# Altium PCB PCB_3U_CamLink.PCBDOC (part 1 of 2)
Units mm, origin at the board's own origin, x right, y up, seen from the top; angles counter-clockwise.
Board outline 64.5 x 100 mm, 4 copper layers (TopLayer, Internal Plane 2, Internal Plane 1, BottomLayer), stack 1.543 mm thick; 107 components, 81 nets, 488 pads, 183 vias.
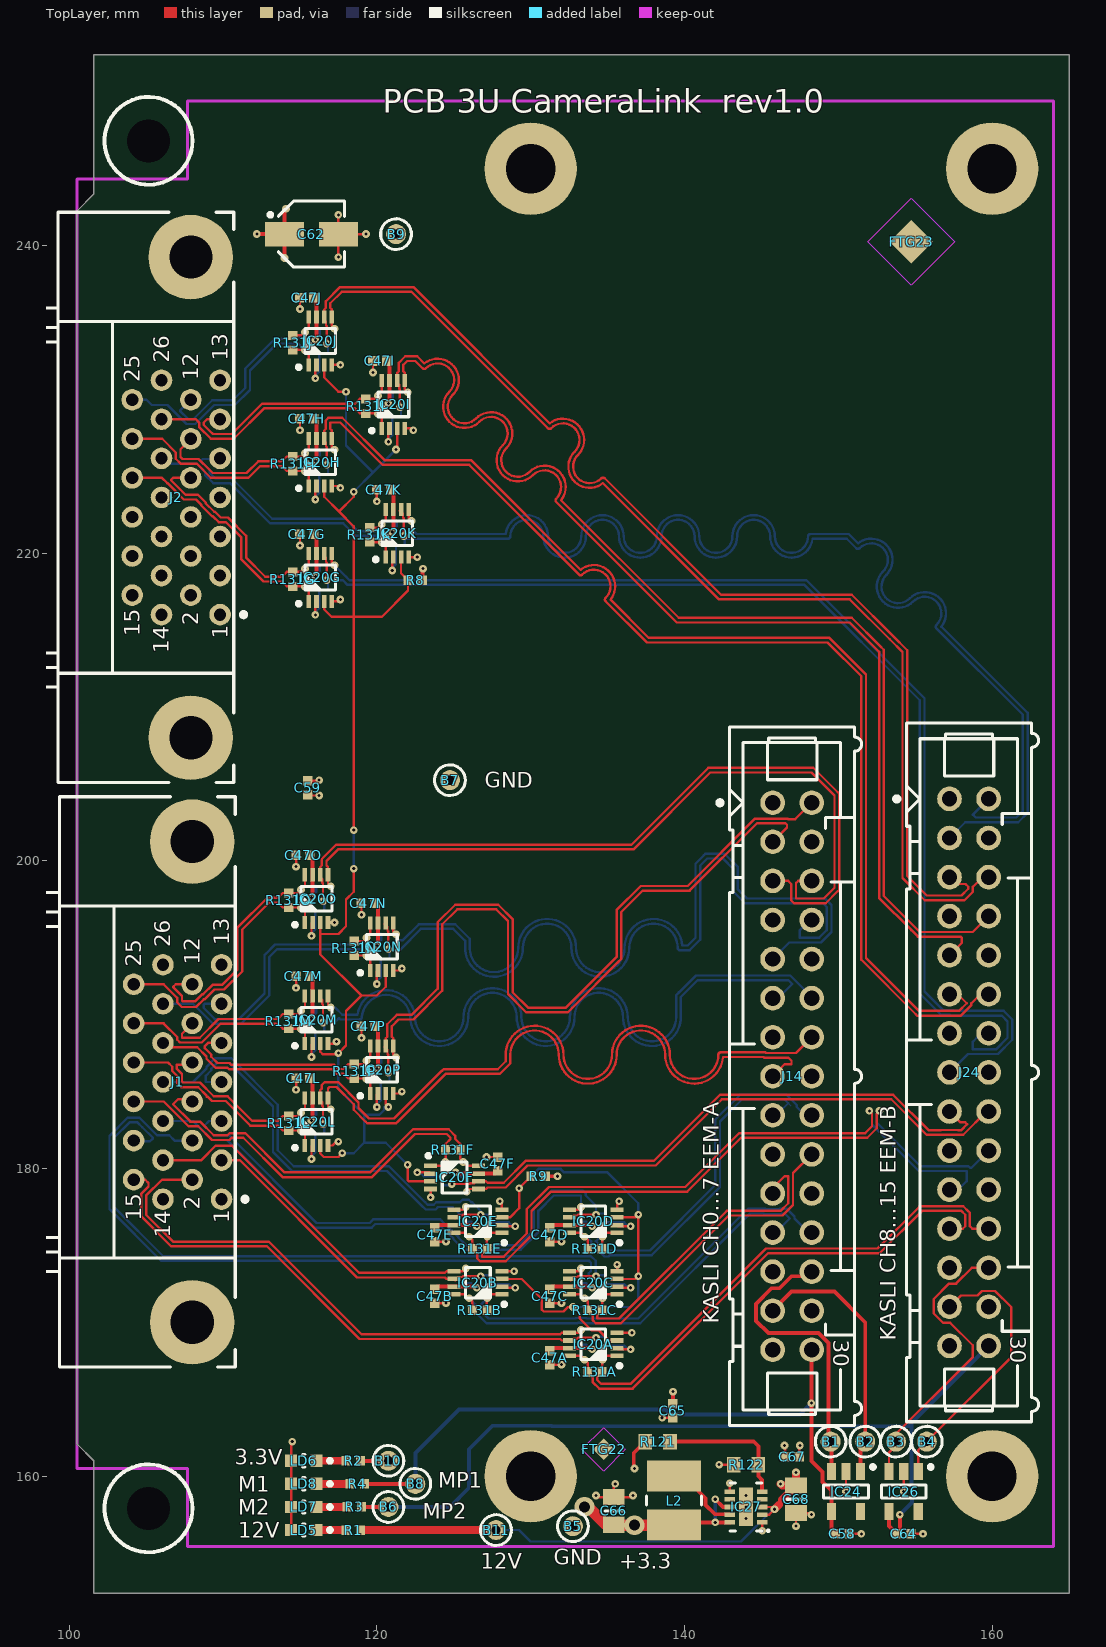
[diagram p0: TopLayer view]
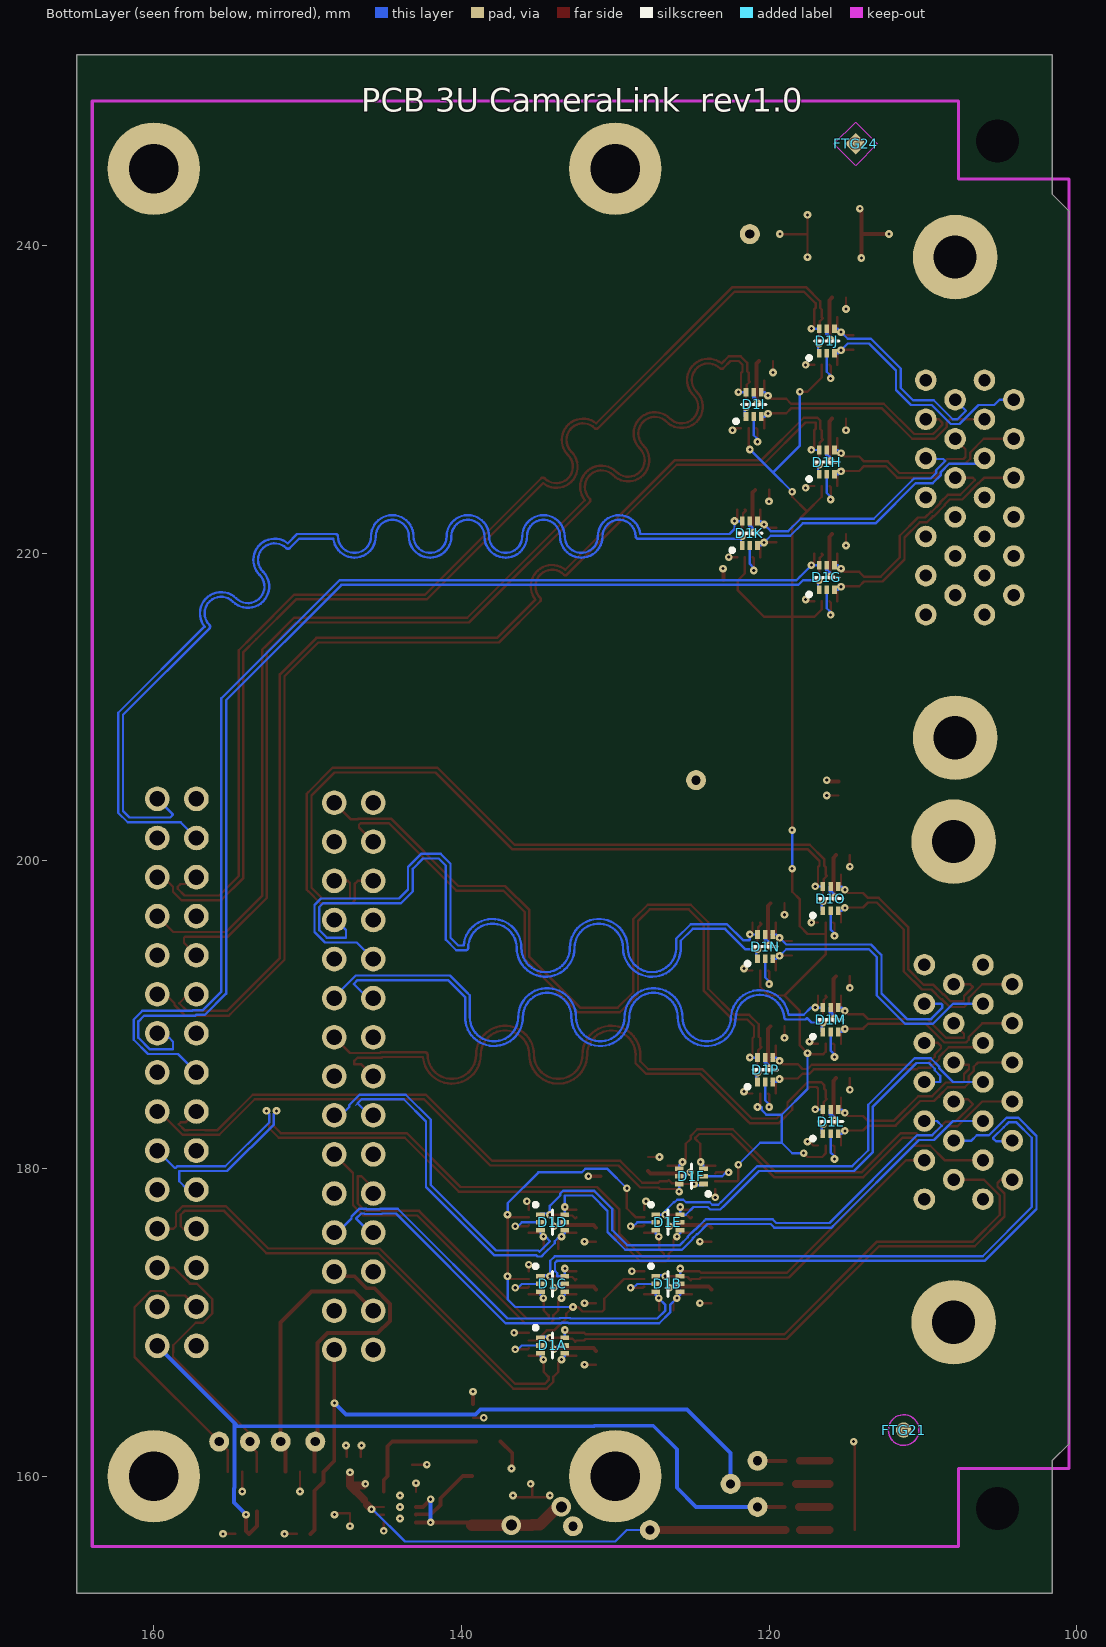
[diagram p1: BottomLayer view, seen from below]
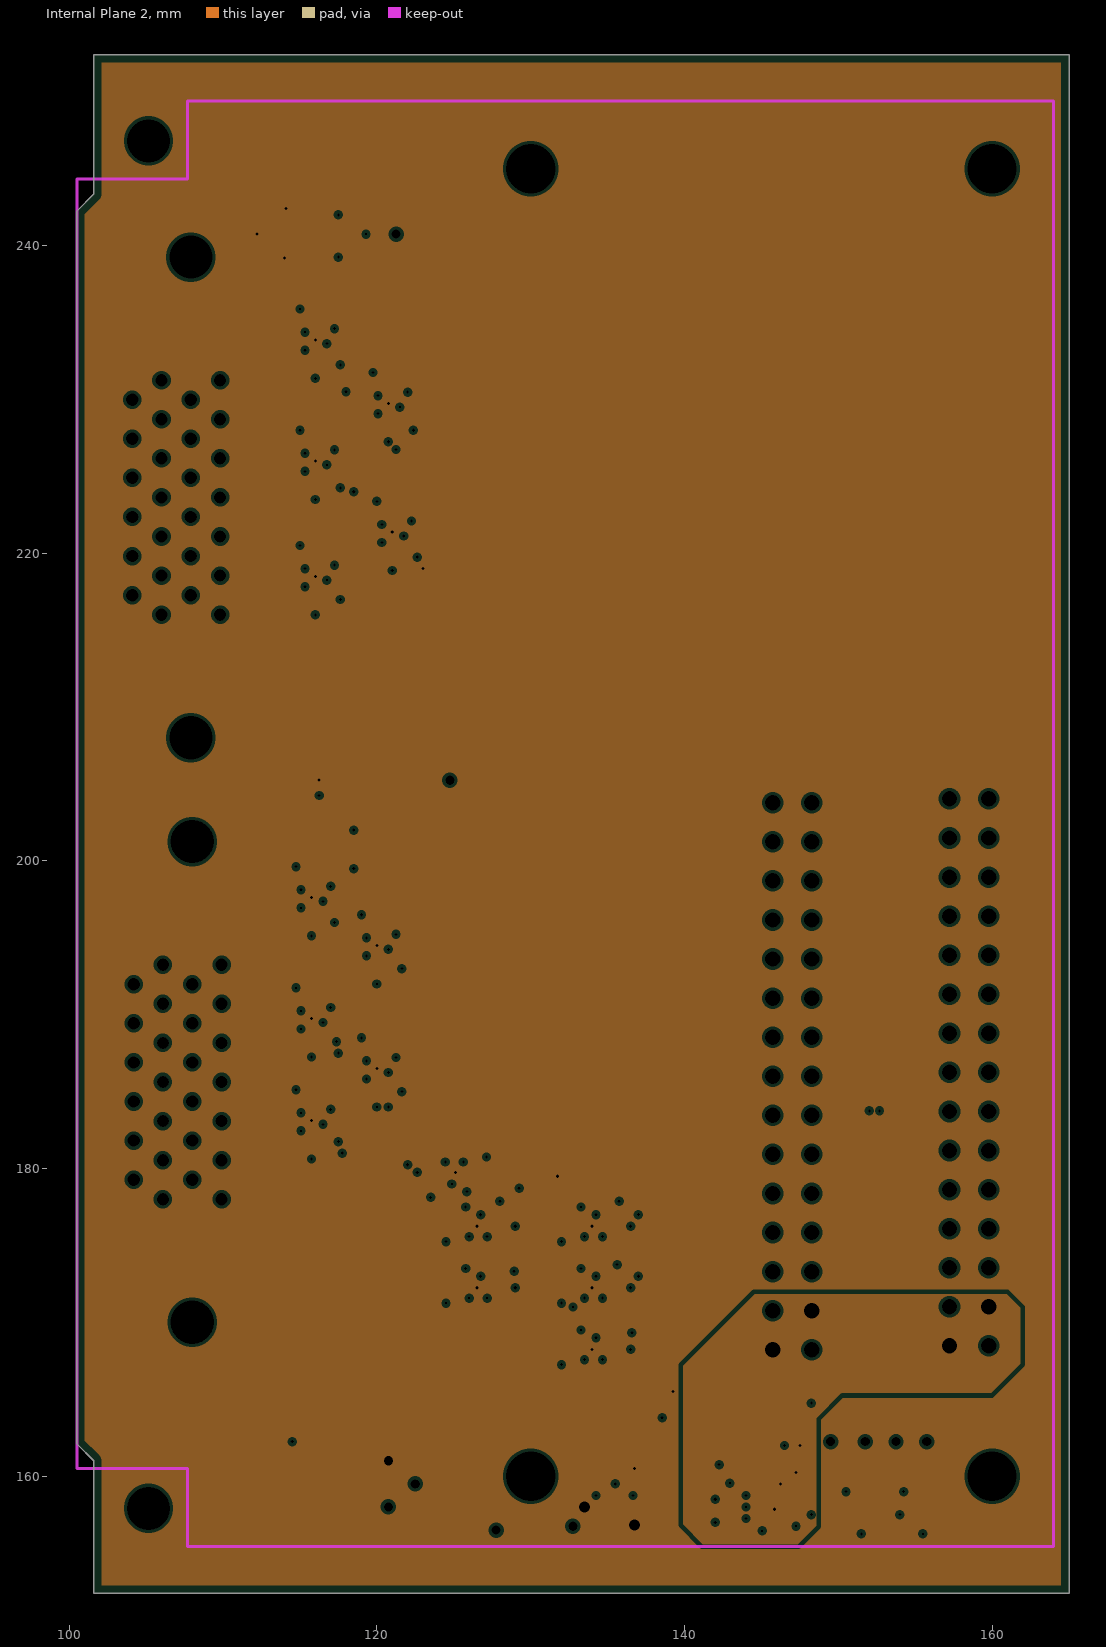
[diagram p2: Internal Plane 2, clearances drawn from the general rule]
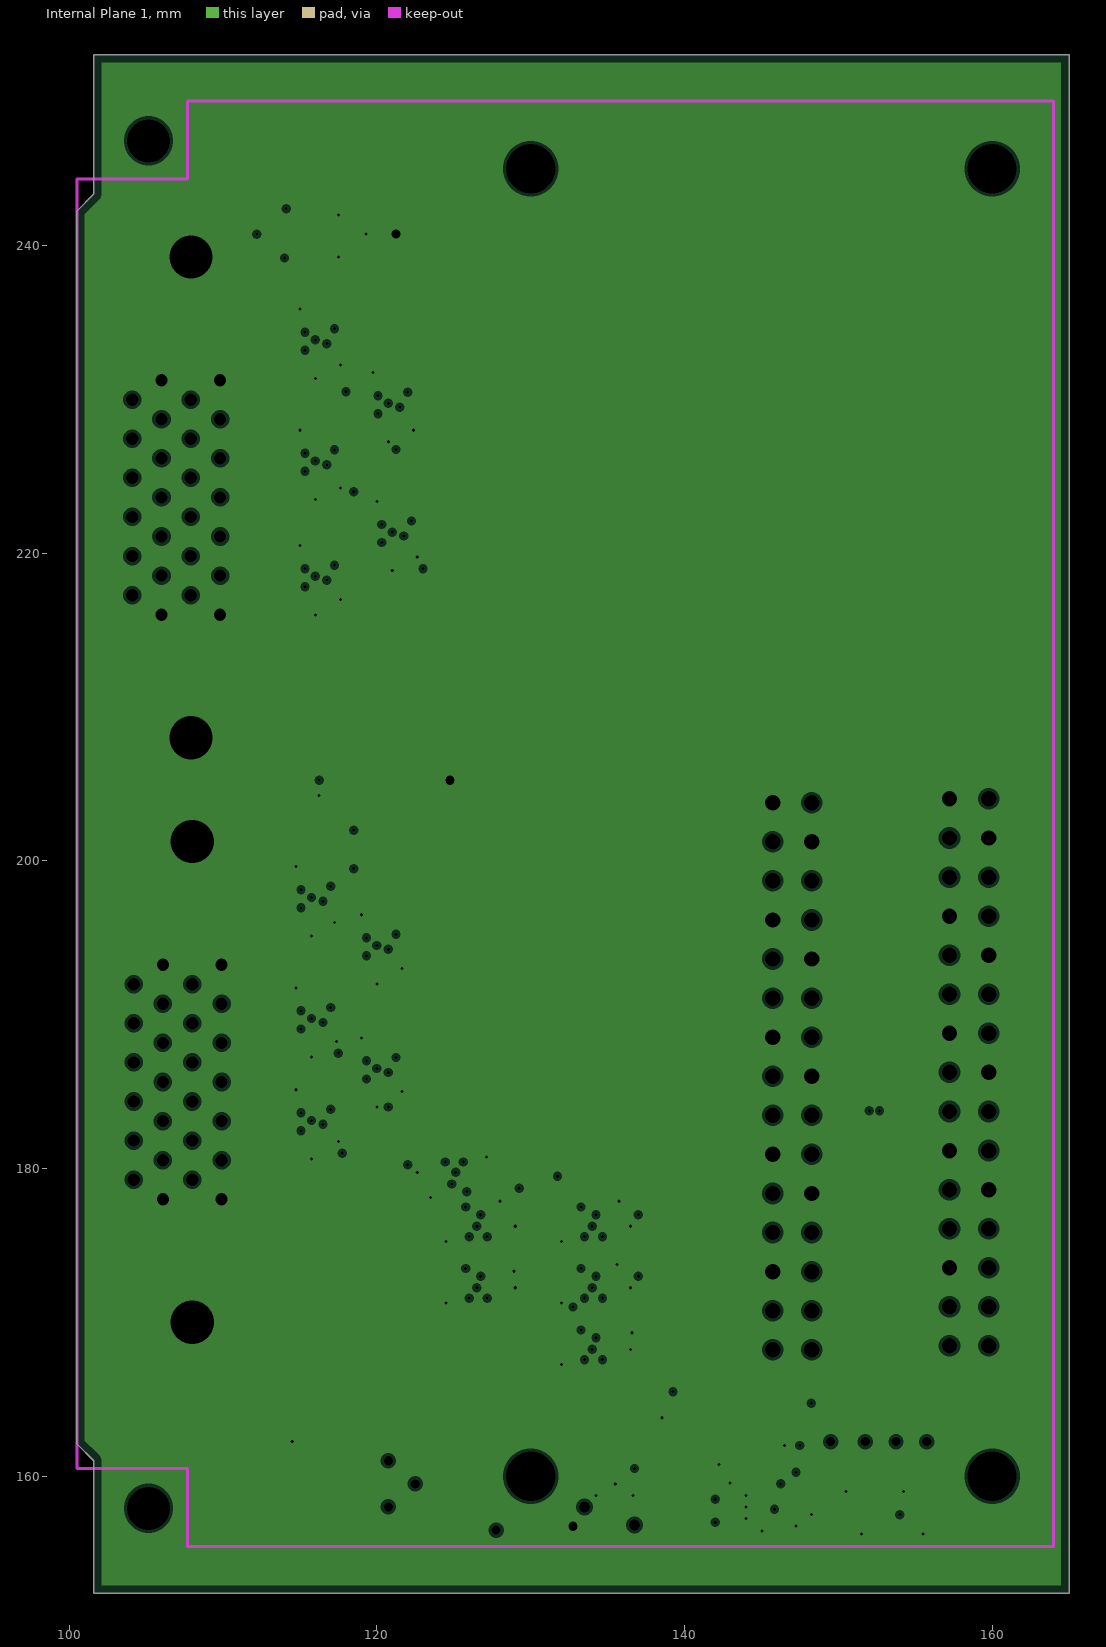
[diagram p3: Internal Plane 1, clearances drawn from the general rule]
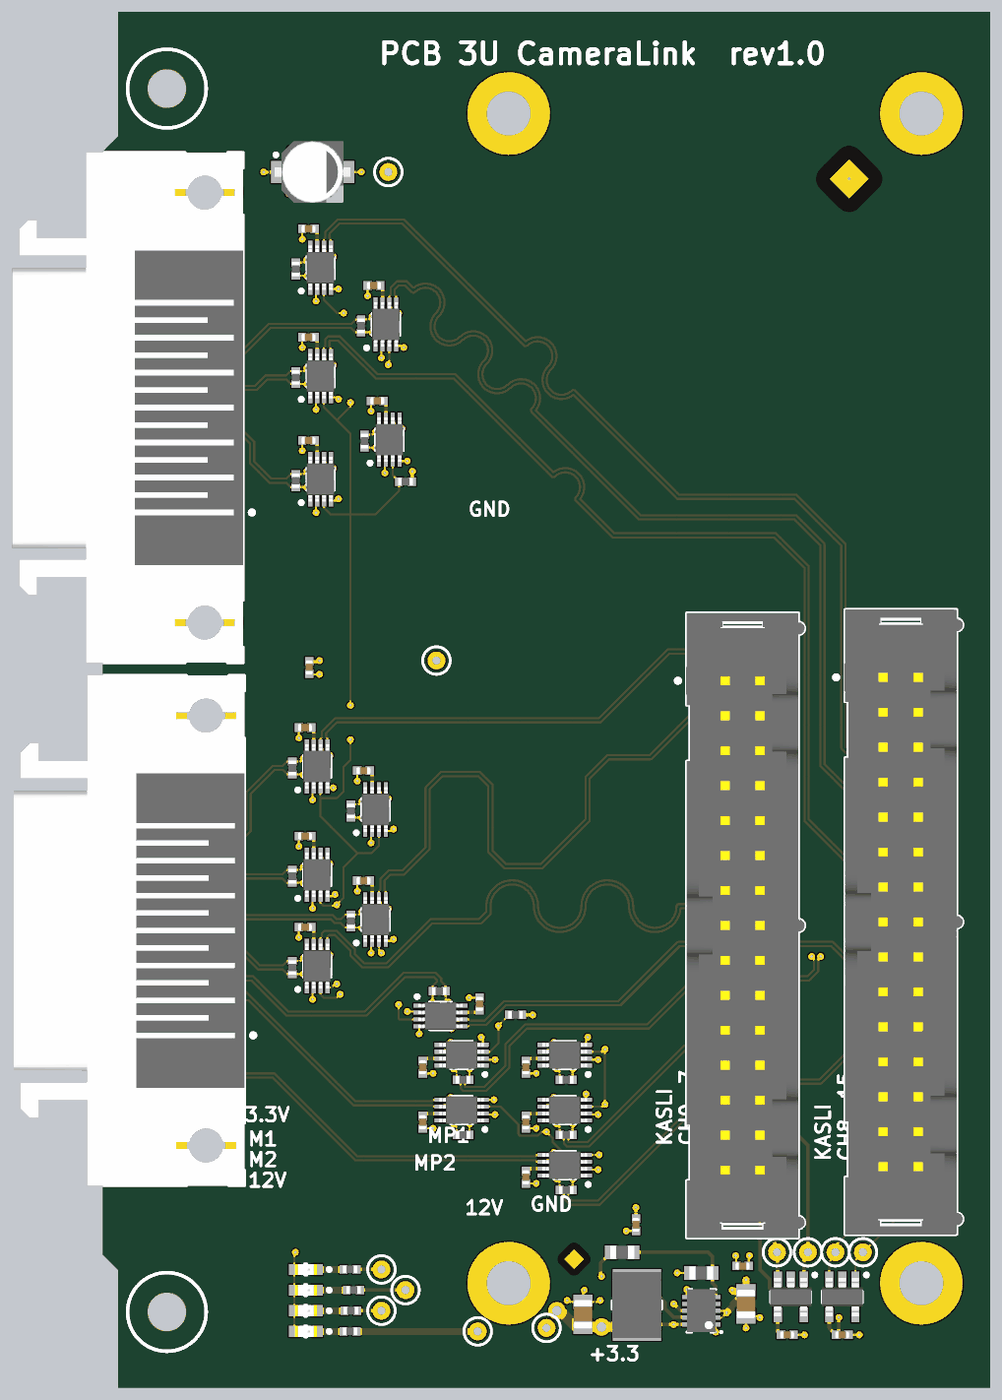
[diagram p5: 3D render of the assembled board from above, using the file's embedded part models]
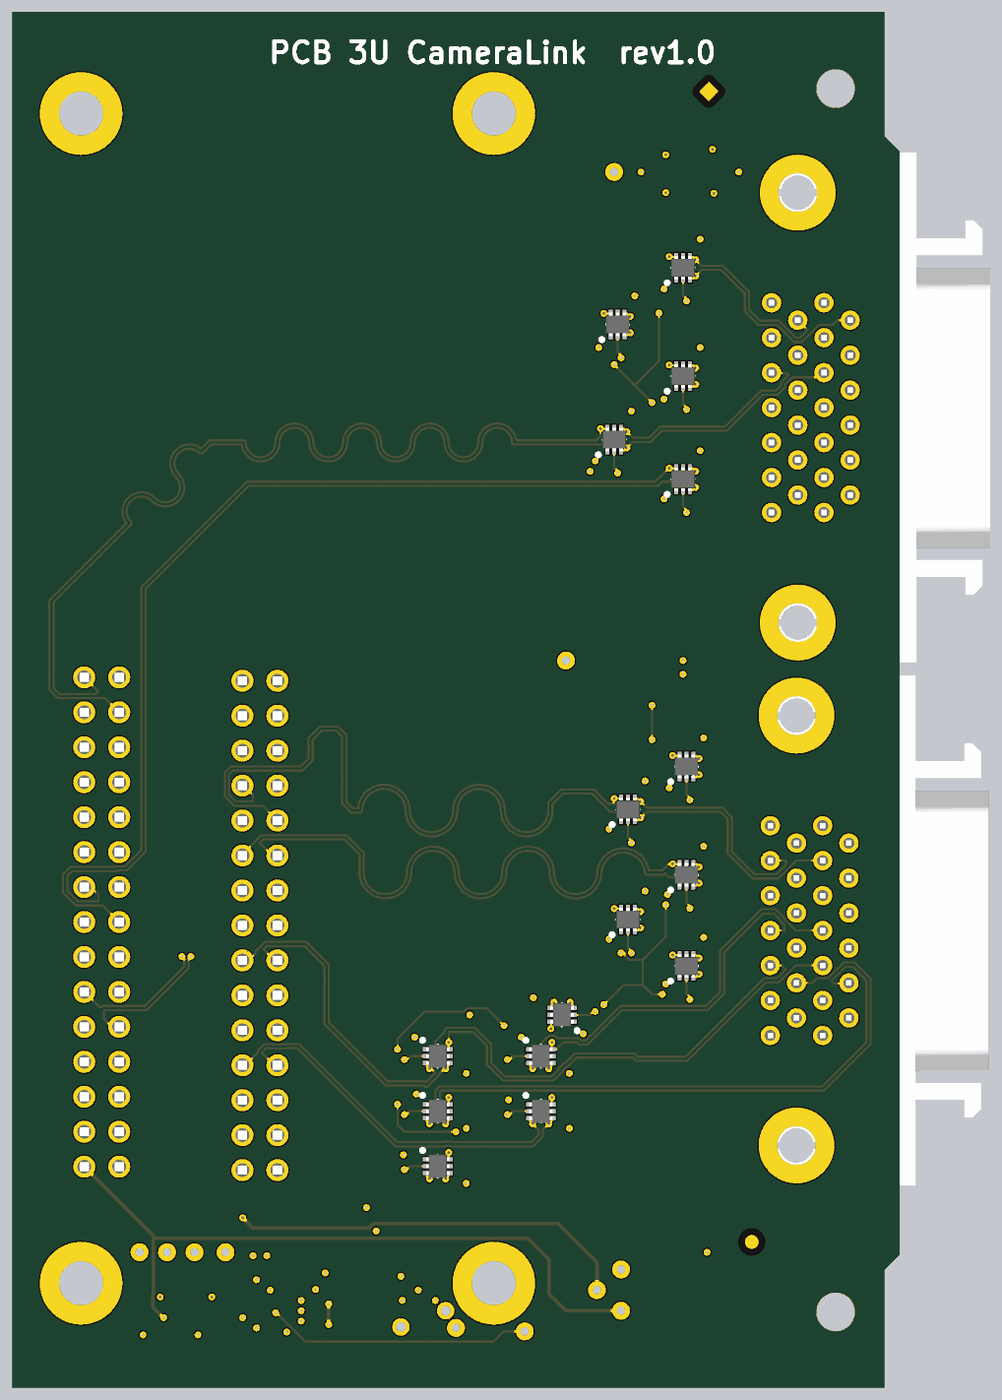
[diagram p6: 3D render of the assembled board from below, using the file's embedded part models]

## Layer stack, top to bottom
TopSolder: solder mask 0.053, Solder Resist, Dk 3.5
TopLayer: signal copper 0.0356
Dielectric1: core 0.2, FR-4, Dk 4.8
Internal Plane 2: plane copper 0.036, net (Multiple Nets)
Dielectric 4: prepreg 1, Dk 4.2
Internal Plane 1: plane copper 0.036, net GND
Dielectric2: core 0.2, FR-4, Dk 4.2
BottomLayer: signal copper 0.0356
BottomSolder: solder mask 0.053, Solder Resist, Dk 3.5

## Board outline
101.6,161 100.5,162.1 100.5,242.25 101.6,243.35 101.6,252.4 165,252.4 165,152.4 101.6,152.4

## Design rules (kind name [scope] priority, off if disabled: settings)
AcuteAngle [All] p1: minimum=6.00000000000000E+0001 checktracksonly=FALSE
Clearance Clearance_poly [(InPolygon)] p1: gap=0.6
Clearance [All] p2: gap=0.152
DiffPairsRouting [All] p1: maxlimit=0.152 minlimit=0.152 mostfreqgap=0.152 toplayer_minwidth=0.152 toplayer_maxwidth=0.152 toplayer_prefwidth=0.152 bottomlayer_minwidth=0.152 bottomlayer_maxwidth=0.152 bottomlayer_prefwidth=0.152 maxuncoupledlength=12.7
Height [All] p1 off: minheight=0 maxheight=25.4 prefheight=12.7
HoleSize [All] p1: absolutevalues=TRUE maxlimit=5.08 minlimit=0.025 maxpercent=80.000 minpercent=20.000
MinimumSolderMaskSliver [All] p1: minsoldermaskwidth=0
MinimumSolderMaskSliver SilkscreenOverComponentPads [All] p2: minsoldermaskwidth=0.254
PlaneClearance [All] p1: clearance=0.203
PlaneConnect PlaneConnect_pad [(InPadClass('All Pads'))] p1: planeconnectstyle=Relief reliefexpansion=0.508 reliefentries=4 reliefconductorwidth=0.254 reliefairgap=0.254
PlaneConnect [All] p2: planeconnectstyle=Direct reliefexpansion=0.508 reliefentries=4 reliefconductorwidth=0.254 reliefairgap=0.254
PolygonConnect PolygonConnect_pad [(InPadClass('All Pads'))] p1: connectstyle=Relief reliefconductorwidth=0.254 reliefentries=4 polygonreliefangle="90 Angle" airgapwidth=0.254
PolygonConnect [All] p2: connectstyle=Direct reliefconductorwidth=0.254 reliefentries=4 polygonreliefangle="90 Angle" airgapwidth=0.254
RoomDefinition U_LVDS_repeater16 [InComponentClass('U_LVDS_repeater16')] p1 off: confinementstyle=ConfineIn formatcopy=TRUE lockcomponents=FALSE outline 117.75,190.5 117.75,183.875 121.75,183.875 121.75,190.5
RoomDefinition U_LVDS_repeater15 [InComponentClass('U_LVDS_repeater15')] p2 off: confinementstyle=ConfineIn formatcopy=TRUE lockcomponents=FALSE outline 113.5,201.625 113.5,195 117.5,195 117.5,201.625
RoomDefinition U_LVDS_repeater14 [InComponentClass('U_LVDS_repeater14')] p3 off: confinementstyle=ConfineIn formatcopy=TRUE lockcomponents=FALSE outline 117.75,198.5 117.75,191.875 121.75,191.875 121.75,198.5
RoomDefinition U_LVDS_repeater13 [InComponentClass('U_LVDS_repeater13')] p4 off: confinementstyle=ConfineIn formatcopy=TRUE lockcomponents=FALSE outline 113.5,193.75 113.5,187.125 117.5,187.125 117.5,193.75
RoomDefinition U_LVDS_repeater12 [InComponentClass('U_LVDS_repeater12')] p5 off: confinementstyle=ConfineIn formatcopy=TRUE lockcomponents=FALSE outline 113.5,187.125 113.5,180.5 117.5,180.5 117.5,187.125
RoomDefinition U_LVDS_repeater11 [InComponentClass('U_LVDS_repeater11')] p6 off: confinementstyle=ConfineIn formatcopy=TRUE lockcomponents=FALSE outline 118.75,225.375 118.75,218.75 122.75,218.75 122.75,225.375
RoomDefinition PCB_3U_CamLink [InComponentClass('PCB_3U_CamLink')] p7 off: confinementstyle=ConfineIn formatcopy=TRUE lockcomponents=FALSE outline 138.546,186.925 135.4,186.925 135.4,181.319 138.546,181.319
RoomDefinition U_LVDS_repeater10 [InComponentClass('U_LVDS_repeater10')] p8 off: confinementstyle=ConfineIn formatcopy=TRUE lockcomponents=FALSE outline 113.75,237.875 113.75,231.25 117.75,231.25 117.75,237.875
RoomDefinition U_LVDS_repeater9 [InComponentClass('U_LVDS_repeater9')] p9 off: confinementstyle=ConfineIn formatcopy=TRUE lockcomponents=FALSE outline 118.5,233.75 118.5,227.125 122.5,227.125 122.5,233.75
RoomDefinition U_LVDS_repeater8 [InComponentClass('U_LVDS_repeater8')] p10 off: confinementstyle=ConfineIn formatcopy=TRUE lockcomponents=FALSE outline 113.75,230 113.75,223.375 117.75,223.375 117.75,230
RoomDefinition U_LVDS_repeater7 [InComponentClass('U_LVDS_repeater7')] p11 off: confinementstyle=ConfineIn formatcopy=TRUE lockcomponents=FALSE outline 113.75,222.5 113.75,215.875 117.75,215.875 117.75,222.5
RoomDefinition U_LVDS_repeater6 [InComponentClass('U_LVDS_repeater6')] p12 off: confinementstyle=ConfineIn formatcopy=TRUE lockcomponents=FALSE outline 129.125,182 122.5,182 122.5,178 129.125,178
RoomDefinition U_LVDS_repeater5 [InComponentClass('U_LVDS_repeater5')] p13 off: confinementstyle=ConfineIn formatcopy=TRUE lockcomponents=FALSE outline 122.5,174 129.125,174 129.125,178 122.5,178
RoomDefinition U_LVDS_repeater4 [InComponentClass('U_LVDS_repeater4')] p14 off: confinementstyle=ConfineIn formatcopy=TRUE lockcomponents=FALSE outline 130,174 136.625,174 136.625,178 130,178
RoomDefinition U_LVDS_repeater3 [InComponentClass('U_LVDS_repeater3')] p15 off: confinementstyle=ConfineIn formatcopy=TRUE lockcomponents=FALSE outline 130,170 136.625,170 136.625,174 130,174
RoomDefinition U_LVDS_repeater2 [InComponentClass('U_LVDS_repeater2')] p16 off: confinementstyle=ConfineIn formatcopy=TRUE lockcomponents=FALSE outline 122.5,170 129.125,170 129.125,174 122.5,174
RoomDefinition U_LVDS_repeater1 [InComponentClass('U_LVDS_repeater1')] p17 off: confinementstyle=ConfineIn formatcopy=TRUE lockcomponents=FALSE outline 130,166 136.625,166 136.625,170 130,170
RoutingVias [All] p1: holewidth=0.2 width=0.5 viastyle="Through Hole" minholewidth=0.2 minwidth=0.5 maxholewidth=0.5 maxwidth=1
SilkToSilkClearance [All] p1: silktosilkclearance=0
SolderMaskExpansion [All] p1: expansion=0.102
ViasUnderSMD ViasUnderSMD_allow [InComponent('IC18') or InComponent('IC10') or InComponent('IC13') or InComponent('IC14') or InComponent('IC15')] p1: allowed=TRUE
ViasUnderSMD [All] p2: allowed=FALSE
Width Width_1 [(InDifferentialPairClass('All Differential Pairs'))] p1: maxlimit=0.203 minlimit=0.203 preferedwidth=0.203
Width [All] p2: maxlimit=2.54 minlimit=0.152 preferedwidth=0.254
23 further rules are at their usual default settings.

## Classes and differential pairs
channel class LVDS_repeater: U_LVDS_repeater1 U_LVDS_repeater2 U_LVDS_repeater3 U_LVDS_repeater4 U_LVDS_repeater5 U_LVDS_repeater6 U_LVDS_repeater7 U_LVDS_repeater8 U_LVDS_repeater9 U_LVDS_repeater10 U_LVDS_repeater11 U_LVDS_repeater12 U_LVDS_repeater13 U_LVDS_repeater14 U_LVDS_repeater15 U_LVDS_repeater16
component class U_LVDS_repeater10: C46J C47J D1J IC19J IC20J R131J R132J R133J T25J
component class U_LVDS_repeater9: C46I C47I D1I IC19I IC20I R131I R132I R133I T25I
component class U_LVDS_repeater8: C46H C47H D1H IC19H IC20H R131H R132H R133H T25H
component class U_LVDS_repeater7: C46G C47G D1G IC19G IC20G R131G R132G R133G T25G
component class U_LVDS_repeater6: C46F C47F D1F IC19F IC20F R131F R132F R133F T25F
component class U_LVDS_repeater5: C46E C47E D1E IC19E IC20E R131E R132E R133E T25E
component class U_LVDS_repeater4: C46D C47D D1D IC19D IC20D R131D R132D R133D T25D
component class U_LVDS_repeater3: C46C C47C D1C IC19C IC20C R131C R132C R133C T25C
component class U_LVDS_repeater2: C46B C47B D1B IC19B IC20B R131B R132B R133B T25B
component class U_LVDS_repeater1: C46A C47A D1A IC19A IC20A R131A R132A R133A T25A
component class PCB_3U_CamLink: B1 B2 B3 B4 B5 B6 B7 B8 B9 B10 B11 C11 C12 C58 C59 C62 C64 C65 C66 C67 C68 FTG21 FTG22 FTG23 FTG24 IC24 IC26 IC27 J1 J2 J4 J14 J24 L2 LD5 LD6 LD7 LD8 R1 R2 R3 R4 R8 R9 R36 R37 R121 R122
component class U_LVDS_repeater11: C47K D1K IC20K R131K
component class U_LVDS_repeater12: C47L D1L IC20L R131L
component class U_LVDS_repeater13: C47M D1M IC20M R131M
component class U_LVDS_repeater14: C47N D1N IC20N R131N
component class U_LVDS_repeater15: C47O D1O IC20O R131O
component class U_LVDS_repeater16: C47P D1P IC20P R131P
differential pair LVDS12: +LVDS12_P -LVDS12_N
differential pair LVDS11: +LVDS11_P -LVDS11_N
differential pair LVDS10: +LVDS10_P -LVDS10_N
differential pair LVDS9: +LVDS9_P -LVDS9_N
differential pair LVDS8: +LVDS8_P -LVDS8_N
differential pair LVDS4: +LVDS4_P -LVDS4_N
differential pair LVDS3: +LVDS3_P -LVDS3_N
differential pair LVDS2: +LVDS2_P -LVDS2_N
differential pair LVDS1: +LVDS1_P -LVDS1_N
differential pair LVDS0: +LVDS0_P -LVDS0_N
differential pair YCLK: +YCLK_P -YCLK_N
differential pair Y3: +Y3_P -Y3_N
differential pair Y2: +Y2_P -Y2_N
differential pair Y1: +Y1_P -Y1_N
differential pair Y0: +Y0_P -Y0_N
differential pair XCLK: +XCLK_P -XCLK_N
differential pair X3: +X3_P -X3_N
differential pair X2: +X2_P -X2_N
differential pair X1: +X1_P -X1_N
differential pair X0: +X0_P -X0_N
differential pair SERTX: +SERTX_P -SERTX_N
differential pair SERRX: +SERRX_P -SERRX_N
differential pair LVDS15: +LVDS15_P -LVDS15_N
differential pair CC0: +CC0_P -CC0_N
differential pair CC1: +CC1_P -CC1_N
differential pair CC2: +CC2_P -CC2_N
differential pair CC3: +CC3_P -CC3_N
differential pair LVDS6: +LVDS5_P -LVDS5_N
differential pair LVDS7: +LVDS6_P -LVDS6_N
differential pair LVDS8: +LVDS7_P -LVDS7_N
differential pair LVDS14: +LVDS13_P -LVDS13_N
differential pair LVDS15: +LVDS14_P -LVDS14_N

## Components (designator, comment, footprint, x,y, rotation, side; value= is the part's Value field where it differs from the comment)
B1 "Plated Hole" c130h60 149.5,162.25 r0 top
B2 "Plated Hole" c130h60 151.75,162.25 r0 top
B3 "Plated Hole" c130h60 153.75,162.25 r0 top
B4 "Plated Hole" c130h60 155.75,162.25 r0 top
B5 "Plated Hole" c130h60 132.75,156.75 r0 top
B6 "Plated Hole" c130h60 120.75,158 r0 top
B7 "Plated Hole" c130h60 124.75,205.25 r0 top
B8 "Plated Hole" c130h60 122.5,159.5 r0 top
B9 "Plated Hole" c130h60 121.25,240.75 r0 top
B10 "Plated Hole" c130h60 120.75,161 r0 top
B11 "Plated Hole" c130h60 127.75,156.5 r0 top
C47A "100nF" CAPC1005X55N 131.25,167.7 r90 top (schematic designator C47)
C47B "100nF" CAPC1005X55N 123.75,171.7 r90 top (schematic designator C47)
C47C "100nF" CAPC1005X55N 131.25,171.7 r90 top (schematic designator C47)
C47D "100nF" CAPC1005X55N 131.25,175.7 r90 top (schematic designator C47)
C47E "100nF" CAPC1005X55N 123.75,175.7 r90 top (schematic designator C47)
C47F "100nF" CAPC1005X55N 127.875,180.3 r270 top (schematic designator C47)
C47G "100nF" CAPC1005X55N 115.45,221.25 r0 top (schematic designator C47)
C47H "100nF" CAPC1005X55N 115.45,228.75 r0 top (schematic designator C47)
C47I "100nF" CAPC1005X55N 120.2,232.5 r0 top (schematic designator C47)
C47J "100nF" CAPC1005X55N 115.45,236.625 r0 top (schematic designator C47)
C47K "100nF" CAPC1005X55N 120.45,224.125 r0 top (schematic designator C47)
C47L "100nF" CAPC1005X55N 115.2,185.875 r0 top (schematic designator C47)
C47M "100nF" CAPC1005X55N 115.2,192.5 r0 top (schematic designator C47)
C47N "100nF" CAPC1005X55N 119.45,197.25 r0 top (schematic designator C47)
C47O "100nF" CAPC1005X55N 115.2,200.375 r0 top (schematic designator C47)
C47P "100nF" CAPC1005X55N 119.45,189.25 r0 top (schematic designator C47)
C58 "100nF" CAPC1005X55N 150.25,156.25 r180 top
C59 "100nF" CAPC1005X55N 115.5,204.75 r90 top
C62 "10uF" CAPAE430X540N 115.75,240.75 r0 top
C64 "100nF" CAPC1005X55N 154.25,156.25 r180 top
C65 "100nF" CAPC1005X55N 139.25,164.25 r90 top
C66 "22uF" CAPC2012X135N 135.407,157.743 r270 top
C67 "100nF" CAPC1005X55N 147,161.25 r0 top
C68 "22uF" CAPC2012X135N 147.25,158.5 r90 top
D1A "NUP4114UPXV6T1G" SOTFL50P160X60-6N 134.075,168.5 r180 bottom (schematic designator D1)
D1B "NUP4114UPXV6T1G" SOTFL50P160X60-6N 126.575,172.5 r180 bottom (schematic designator D1)
D1C "NUP4114UPXV6T1G" SOTFL50P160X60-6N 134.075,172.5 r180 bottom (schematic designator D1)
D1D "NUP4114UPXV6T1G" SOTFL50P160X60-6N 134.075,176.5 r180 bottom (schematic designator D1)
D1E "NUP4114UPXV6T1G" SOTFL50P160X60-6N 126.575,176.5 r180 bottom (schematic designator D1)
D1F "NUP4114UPXV6T1G" SOTFL50P160X60-6N 125.05,179.5 r0 bottom (schematic designator D1)
D1G "NUP4114UPXV6T1G" SOTFL50P160X60-6N 116.25,218.425 r90 bottom (schematic designator D1)
D1H "NUP4114UPXV6T1G" SOTFL50P160X60-6N 116.25,225.925 r90 bottom (schematic designator D1)
D1I "NUP4114UPXV6T1G" SOTFL50P160X60-6N 121,229.675 r90 bottom (schematic designator D1)
D1J "NUP4114UPXV6T1G" SOTFL50P160X60-6N 116.25,233.8 r90 bottom (schematic designator D1)
D1K "NUP4114UPXV6T1G" SOTFL50P160X60-6N 121.25,221.3 r90 bottom (schematic designator D1)
D1L "NUP4114UPXV6T1G" SOTFL50P160X60-6N 116,183.05 r90 bottom (schematic designator D1)
D1M "NUP4114UPXV6T1G" SOTFL50P160X60-6N 116,189.675 r90 bottom (schematic designator D1)
D1N "NUP4114UPXV6T1G" SOTFL50P160X60-6N 120.25,194.425 r90 bottom (schematic designator D1)
D1O "NUP4114UPXV6T1G" SOTFL50P160X60-6N 116,197.55 r90 bottom (schematic designator D1)
D1P "NUP4114UPXV6T1G" SOTFL50P160X60-6N 120.25,186.425 r90 bottom (schematic designator D1)
FTG21 "Use only in PCB" FIDUCIAL_TOP_C100-200 111.25,163 r90 bottom
FTG22 "Use only in PCB" FIDUCIAL_TOP_S100-200 134.75,161.75 r90 top
FTG23 "Use only in PCB" FIDUCIAL_TOP_S200-400 154.75,240.25 r0 top
FTG24 "Use only in PCB" FIDUCIAL_TOP_S100-200 114.376,246.609 r90 bottom
IC20A "FIN1101K8X" SOP50P310X90-8N 134.075,168.575 r180 top (schematic designator IC20)
IC20B "FIN1101K8X" SOP50P310X90-8N 126.575,172.575 r180 top (schematic designator IC20)
IC20C "FIN1101K8X" SOP50P310X90-8N 134.075,172.575 r180 top (schematic designator IC20)
IC20D "FIN1101K8X" SOP50P310X90-8N 134.075,176.575 r180 top (schematic designator IC20)
IC20E "FIN1101K8X" SOP50P310X90-8N 126.575,176.575 r180 top (schematic designator IC20)
IC20F "FIN1101K8X" SOP50P310X90-8N 125.05,179.425 r0 top (schematic designator IC20)
IC20G "FIN1101K8X" SOP50P310X90-8N 116.325,218.425 r90 top (schematic designator IC20)
IC20H "FIN1101K8X" SOP50P310X90-8N 116.325,225.925 r90 top (schematic designator IC20)
IC20I "FIN1101K8X" SOP50P310X90-8N 121.075,229.675 r90 top (schematic designator IC20)
IC20J "FIN1101K8X" SOP50P310X90-8N 116.325,233.8 r90 top (schematic designator IC20)
IC20K "FIN1101K8X" SOP50P310X90-8N 121.325,221.3 r90 top (schematic designator IC20)
IC20L "FIN1101K8X" SOP50P310X90-8N 116.075,183.05 r90 top (schematic designator IC20)
IC20M "FIN1101K8X" SOP50P310X90-8N 116.075,189.675 r90 top (schematic designator IC20)
IC20N "FIN1101K8X" SOP50P310X90-8N 120.325,194.425 r90 top (schematic designator IC20)
IC20O "FIN1101K8X" SOP50P310X90-8N 116.075,197.55 r90 top (schematic designator IC20)
IC20P "FIN1101K8X" SOP50P310X90-8N 120.325,186.425 r90 top (schematic designator IC20)
IC24 "24AA02E48T-I/OT" SOT95P280X145-5N 150.5,159 r270 top
IC26 "24AA02E48T-I/OT" SOT95P280X145-5N 154.25,159 r270 top
IC27 "TPS62175DQC" SON50P200X300X80-11N-R94X250 144,158 r180 top
J1 "MDR 26" 3M_N10226-5212PC 105.079,185.629 r90 top
J2 "MDR 26" 3M_N10226-5212PC 104.984,223.63 r90 top
J14 "Familly" 3M_N2530-6002RB 147,186 r270 top
J24 "Familly" 3M_N2530-6002RB 158.5,186.25 r270 top
L2 "10uH" IND_MURATA-PS_8400 139.319,158.42 r270 top
LD5 "Green" LED_KINGBRIGHT_KPH-1608CGCK 115.25,156.5 r180 top
LD6 "Green" LED_KINGBRIGHT_KPH-1608CGCK 115.25,161 r180 top
LD7 "Green" LED_KINGBRIGHT_KPH-1608CGCK 115.25,158 r180 top
LD8 "Green" LED_KINGBRIGHT_KPH-1608CGCK 115.25,159.5 r180 top
R1 "10k" RESC1005X40N 118.47,156.5 r0 top
R2 "470" RESC1005X40N 118.47,161 r180 top
R3 "470" RESC1005X40N 118.53,158 r180 top
R4 "470" RESC1005X40N 118.72,159.5 r180 top
R8 "100" RESC1005X40N 122.5,218.25 r180 top
R9 "100" RESC1005X40N 130.5,179.5 r180 top
R121 "270k" RESC1608X55N 138.25,162.25 r180 top
R122 "82k" RESC1608X55N 144,160.75 r0 top
R131A "100" RESC1005X40N 134.18,166.775 r180 top (schematic designator R131)
R131B "100" RESC1005X40N 126.68,170.775 r180 top (schematic designator R131)
R131C "100" RESC1005X40N 134.18,170.775 r180 top (schematic designator R131)
R131D "100" RESC1005X40N 134.18,174.775 r180 top (schematic designator R131)
R131E "100" RESC1005X40N 126.68,174.775 r180 top (schematic designator R131)
R131F "100" RESC1005X40N 124.945,181.225 r0 top (schematic designator R131)
R131G "100" RESC1005X40N 114.525,218.32 r90 top (schematic designator R131)
R131H "100" RESC1005X40N 114.525,225.82 r90 top (schematic designator R131)
R131I "100" RESC1005X40N 119.275,229.57 r90 top (schematic designator R131)
R131J "100" RESC1005X40N 114.525,233.695 r90 top (schematic designator R131)
R131K "100" RESC1005X40N 119.525,221.195 r90 top (schematic designator R131)
R131L "100" RESC1005X40N 114.275,182.945 r90 top (schematic designator R131)
R131M "100" RESC1005X40N 114.275,189.57 r90 top (schematic designator R131)
R131N "100" RESC1005X40N 118.525,194.32 r90 top (schematic designator R131)
R131O "100" RESC1005X40N 114.275,197.445 r90 top (schematic designator R131)
R131P "100" RESC1005X40N 118.525,186.32 r90 top (schematic designator R131)

## Footprints (in the part's own frame and the unit in brackets; to place one, negate y for a bottom-side part, rotate by r counter-clockwise, add the part's x,y. Pads: shape width x height; smd on the part's side, far side on the other; paste and mask are expansions set on the pad)
3M_N2530-6002RB [mm] "30 Contacts - Straight .100\" x .100\" Low Profile Four-Wall Header"
  round 1.6 hole 1: 1(-17.78,-1.27) 2(-17.78,1.27) 3(-15.24,-1.27) 4(-15.24,1.27) 5(-12.7,-1.27) 6(-12.7,1.27) 7(-10.16,-1.27) 8(-10.16,1.27) 9(-7.62,-1.27) 10(-7.62,1.27) 11(-5.08,-1.27) 12(-5.08,1.27) 13(-2.54,-1.27) 14(-2.54,1.27) 15(0,-1.27) 16(0,1.27) 17(2.54,-1.27) 18(2.54,1.27) 19(5.08,-1.27) 20(5.08,1.27) 21(7.62,-1.27) 22(7.62,1.27) 23(10.16,-1.27) 24(10.16,1.27) 25(12.7,-1.27) 26(12.7,1.27) 27(15.24,-1.27) 28(15.24,1.27) 29(17.78,-1.27) 30(17.78,1.27)
  silkscreen extent -22.71,-4.85 22.71,4.52, body extent -22.71,-4.11 22.71,4.52, height 9.91
3M_N10226-5212PC [mm] "26 contacts, Mini D Ribbon (MDR), 102 Series, .050\" Boardmount Through-hole Right Angle Receptacle-Shielded"
  round 1.4 hole 0.8: 1(-7.62,-4.826) 2(-6.35,-2.921) 3(-5.08,-4.826) 4(-3.81,-2.921) 5(-2.54,-4.826) 6(-1.27,-2.921) 7(0,-4.826) 8(1.27,-2.921) 9(2.54,-4.826) 10(3.81,-2.921) 11(5.08,-4.826) 12(6.35,-2.921) 13(7.62,-4.826) 14(-7.62,-1.016) 15(-6.35,0.889) 16(-5.08,-1.016) 17(-3.81,0.889) 18(-2.54,-1.016) 19(-1.27,0.889) 20(0,-1.016) 21(1.27,0.889) 22(2.54,-1.016) 23(3.81,0.889) 24(5.08,-1.016) 25(6.35,0.889) 26(7.62,-1.016)
  round 5.5 hole 2.8: 27(-15.621,-2.921) 28(15.621,-2.921)
  silkscreen extent -18.54,-6.5 18.54,11.05, body extent -18.54,-5.71 18.54,11.05, height 9.4
c130h60 [mm] "Plated Through Hole: Hole Dia.=0.6mm Pad Dia.=1.30mm"
  round 1.3 hole 0.6: 1(0,0)
  silkscreen extent -1,-1 1,1
CAPAE430X540N [mm] "Capacitor, Aluminium Electrolytric, 4.3mm L X 4.3mm W X 5.4mm H, IPC Medium Density"
  rect 2.55x1.6 smd: 1(-1.75,0) 2(1.75,0)
  silkscreen extent -2.8,-2.15 2.15,2.15, body extent -2.75,-2.25 2.75,2.25, height 5.7
CAPC1005X55N [mm] "Chip Capacitor, Body 1.0x0.55mm, IPC Medium Density"
  rect 0.62x0.62 smd: 1(-0.45,0) 2(0.45,0)
  body extent -0.52,-0.27 0.53,0.28, height 0.55
CAPC2012X135N [mm] "Chip Capacitor, Body 2.0x1.25mm, IPC Medium Density"
  rect 1.05x1.4 smd: 1(-0.9,0) 2(0.9,0)
  silkscreen extent 0,-0.58 0,0.57, body extent -1.05,-0.67 1.05,0.68, height 1.25
FIDUCIAL_TOP_C100-200 [mm] "Round Fiducial Target, Top Layer, 1.0mm, Top Solder 2.0mm, Keepout =2.0mm"
  round 1 smd paste-0.51 mask+0.5: FTG2(0,0)
  TopLayer keep-out circle w0.1: c0,0 r1
FIDUCIAL_TOP_S100-200 [mm] "Square Fiducial Target, Top Layer, 1.0mm, Top Solder 2.0mm, Keepout =2.0mm"
  rect 1x1 smd rot 45 paste-0.51 mask+0.5: 1(0,0)
  TopLayer keep-out region: 1.414,0 0,-1.414 -1.414,0 0,1.414
FIDUCIAL_TOP_S200-400 [mm] "Square Fiducial Target, Top Layer, 2.0mm, Top Solder 4.0mm, Keepout =4.0mm"
  rect 2x2 smd rot 45 paste-0.9 mask+1: 1(0,0)
  TopLayer keep-out region: -2.839,0.011 -0.011,2.839 2.818,0.011 -0.011,-2.818
IND_MURATA-PS_8400 [mm] "Miniature Surface Mount Power Inductors, 4.5mm L X 3.3mm W X 2.9mm H, MURATA 8400 Serie"
  rect 2x3.5 smd: 1(-1.6,0) 2(1.6,0)
  silkscreen extent -0.3,-1.8 0.3,1.8, body extent -2.4,-1.8 2.4,1.8, height 2.9
LED_KINGBRIGHT_KPH-1608CGCK [mm] "SMT Green LED, Case 0603, Body L 1.6 x W 0.8mm H 0.65mm"
  rect 0.8x0.8 smd: 1(0.825,0) 2(-0.825,0)
  silkscreen extent -1.83,-0.4 0.08,0.4, body extent -0.8,-0.4 0.8,0.4, height 0.65
RESC1005X40N [mm] "Chip Resistor, EIA 0402, Metric 1005, Body 1.0x0.5mm, IPC Medium Density"
  rect 0.58x0.62 smd: 1(-0.47,0) 2(0.47,0)
  body extent -0.52,-0.27 0.53,0.28, height 0.4
RESC1608X55N [mm] "Chip Resistor, EIA 0603, Metric 1608, Body 1.6x0.8mm, IPC Medium Density"
  rect 0.9x1 smd: 1(-0.8,0) 2(0.8,0)
  body extent -0.87,-0.47 0.88,0.48, height 0.55
SON50P200X300X80-11N-R94X250 [mm] "SON, 10-Leads, Body 2x3mm, Pitch 0.5mm, Thermal Pad 0.94x2.5mm, IPC Medium Density"
  rect 0.7x0.3 smd: 1(-1.05,1) 2(-1.05,0.5) 3(-1.05,0) 4(-1.05,-0.5) 5(-1.05,-1) 6(1.05,-1) 7(1.05,-0.5) 8(1.05,0) 9(1.05,0.5) 10(1.05,1)
  rect 0.94x2.5 smd: 11(0,0)
  silkscreen extent -1.5,-1.55 1.05,1.6, body extent -1.05,-1.55 1.05,1.55, height 0.8
SOP50P310X90-8N [mm] "SOP, 0.50mm pitch; 8 pin, 2.30mm W X 2.00mm L X 0.90mm H body, PC Medium Density"
  rect 0.85x0.3 smd: 1(-1.55,0.75) 2(-1.55,0.25) 3(-1.55,-0.25) 4(-1.55,-0.75) 5(1.55,-0.75) 6(1.55,-0.25) 7(1.55,0.25) 8(1.55,0.75)
  silkscreen extent -1.83,-1 0.8,1.52, body extent -1.62,-1 1.62,1, height 0.9
SOT95P280X145-5N [mm] "SOT, 0.95mm pitch; 5 pin, 1.60mm W X 2.90mm L X 1.45mm H body, IPC Medium Density"
  rect 1.1x0.6 smd: 1(-1.3,0.95) 2(-1.3,0) 3(-1.3,-0.95) 4(1.3,-0.95) 5(1.3,0.95)
  silkscreen extent -1.72,-1.45 0.43,1.88, body extent -1.4,-1.5 1.4,1.5, height 1.45
SOTFL50P160X60-6N [mm] "SOTFL (SOT666), 0.50mm, Pitch; 6 Pin, 1.20mm W X 1.60mm L X 0.60mm H Body, IPC Medium Density"
  rect 0.57x0.3 smd: 1(-0.79,0.5) 2(-0.79,0) 3(-0.79,-0.5) 4(0.79,-0.5) 5(0.79,0) 6(0.79,0.5)
  silkscreen extent -1.23,-0.8 0,1.27, body extent -0.85,-0.85 0.85,0.85, height 0.6

## Part data
B1 B2 B3 B4 B5 B6 B7 B8 B9 B10 B11: library part PLATED_HOLE0.6_PAD1.3, "Single Terminal Socket"
C47A C47B C47C C47D C47E C47F C47G C47H C47I C47J C47K C47L C47M C47N C47O C47P C58 C59 C64 C65 C67: library part CC0402_100NF_16V_10%_X5R, "Non-polarised capacitor"
C62: library part CAE430-540_10UF_16V_20%, "Polarised capacitor"
C66 C68: library part CC0805_22UF_16V_10%_X5R, "Non-polarised capacitor"
FTG21: library part FIDUCIAL_TARGET_C100-200, "Fiducial Target"
FTG22 FTG24: library part FIDUCIAL_TARGET_S100-200, "Fiducial Target"
FTG23: library part FIDUCIAL_TARGET_S200-400, "Fiducial Target"
IC20A IC20B IC20C IC20D IC20E IC20F IC20G IC20H IC20I IC20J IC20K IC20L IC20M IC20N IC20O IC20P: "LVDS Single Port High Speed Repeater"
IC24 IC26: "1.7V-5.5V, 2K I2C Serial EEPROM With EUI-48 Node Identity"
IC27: "4.75-28VDC to 1-6VDC, 500mA Step-Down Converter With Sleep Mode"
J1 J2: library part 3M_N10226-5212PC, "Connector Mini D Ribbon (MDR) 26 Female"
J14 J24: library part 3M_N2530-6002RB, "Connector 30 Male"
L2: library part IND_10UH_10%_MURATA-PS_8400, "Inductor With Core"
LD5 LD6 LD7 LD8: library part LED_KINGBRIGHT_KPH-1608CGCK, "LED Green 1C 2A"
R1: library part R0402_10K_1%_0.0625W_100PPM, "Resistor - 1%"
R2 R3 R4: library part R0402_470R_1%_0.0625W_100PPM, "Resistor - 1%"
R8 R9 R131A R131B R131C R131D R131E R131F R131G R131H R131I R131J R131K R131L R131M R131N R131O R131P: library part R0402_100R_1%_0.1W_100PPM, "Resistor - 1%"
R121: library part R0603_270K_1%_0.1W_100PPM, "Resistor - 1%"
R122: library part R0603_82K_1%_0.1W_100PPM, "Resistor - 1%"

## Free pads (board coordinates)
  round 6 hole 3.2: 0(160,160) 1(160,245) 2(130,245) 3(130,160)
  round 1.27 hole 2.794: 1(105.156,246.812) 2(105.156,157.912)

## Via types
v1: diameter 0.5, hole 0.2, TopLayer to BottomLayer, 181 vias
v2: diameter 1.27, hole 0.711, TopLayer to BottomLayer, 2 vias

## Nets (pads, with @x,y where several pads share a name; then routed paths per layer and width w, separated by ;. In a path a pad name is that pad's centre, name@x,y a point inside that pad or via, vN(x,y) a via of type N, cw(c..) or ccw(c..) an arc to the next point about the centre after c; other vN are vias at no path point)
CC0_N: D1D.6 IC20D.5 J1.18 | length 35.1
  TopLayer w0.152: IC20D.5@132.525,177.325 133.1,177.325 v1(133.275,177.5)
  BottomLayer w0.152: J1.18@106.095,183.089 108.043,183.089 109.277,181.856 110.257,181.856 115.863,176.25 115.952,176.161 119.661,176.161 119.75,176.25 119.894,176.394 123.994,176.394 124.66,175.729 124.698,175.729 124.979,175.448 124.979,175.41 125.669,174.72 129.346,174.72 130.5,175.874 130.5,177.25 131.5,178.25 133.275,178.25 v1(133.275,177.5) 133.285,177.49 D1D.6@133.285,177.075
CC0_P: D1D.1 IC20D.6 J1.5 | length 36
  TopLayer w0.152: IC20D.6@132.525,176.825 132.6,176.75 132.796,176.946 133.045,176.946 133.098,177 v1(134.25,177)
  BottomLayer w0.152: J1.5@109.905,183.089 109.089,183.089 108.782,182.782 109.403,182.16 110.384,182.16 116.078,176.466 119.534,176.466 119.679,176.61 119.768,176.699 124.121,176.699 124.21,176.61 124.787,176.033 124.824,176.033 125.283,175.574 125.283,175.537 125.795,175.025 129.22,175.025 130.195,176 130.195,177.376 131.374,178.555 133.401,178.555 133.58,178.376 133.58,178.25 134.25,177.58 v1(134.25,177) 134.325,177 134.4,177.075 D1D.1@134.865,177.075
CC1_N: D1C.6 IC20C.5 J1.4 | length 46.7
  TopLayer w0.152: IC20C.5@132.525,173.325 133.1,173.325 v1(133.275,173.5)
  BottomLayer w0.152: J1.4@108,181.819 106.841,181.819 106.5,182.16 105.71,182.16 105.166,182.704 104.566,183.305 103.794,183.305 102.615,182.126 102.615,177.374 105.989,174 133.798,174 133.923,173.875 133.923,173.349 133.771,173.198 133.771,173 D1C.6@133.285,173 ; v1(133.275,173.5) 133.285,173.49 D1C.6@133.285,173.075
CC1_P: D1C.1 IC20C.6 J1.17 | length 45.6
  TopLayer w0.152: IC20C.6@132.525,172.825 132.6,172.75 132.796,172.946 133.045,172.946 133.098,173 v1(134.25,173)
  BottomLayer w0.152: J1.17@104.19,181.819 104.238,181.771 105.25,181.771 105.44,181.961 105.44,182 104.75,182.69 104.44,183 103.92,183 102.92,182 102.92,177.5 106.115,174.305 133.924,174.305 134.227,174.001 134.227,173.075 v1@134.4,173.075 ; v1(134.25,173) 134.325,173 v1@134.4,173.075 ; D1C.1@134.865,173 134.79,173.075 v1@134.4,173.075
CC2_N: D1B.6 IC20B.5 J1.16 | length 24
  TopLayer w0.152: J1.16@106.095,180.549 108.592,180.549 109.52,181.478 110.591,181.478 118.842,173.227 124.426,173.227 124.524,173.325 IC20B.5@125.025,173.325 125.6,173.325 v1(125.775,173.5)
  BottomLayer w0.152: v1(125.775,173.5) 125.785,173.49 D1B.6@125.785,173.075
CC2_P: D1B.1 IC20B.6 J1.3 | length 20.8
  TopLayer w0.152: J1.3@109.905,180.549 111.089,180.549 118.715,172.923 124.426,172.923 124.524,172.825 IC20B.6@125.025,172.825 125.1,172.75 125.296,172.946 125.545,172.946 125.598,173 v1(126.75,173)
  BottomLayer w0.152: v1(126.75,173) 126.825,173 126.9,173.075 D1B.1@127.365,173.075
CC3_N: D1A.6 IC20A.5 J1.2 | length 36.7
  TopLayer w0.152: J1.2@108,179.279 106.029,179.279 105,178.25 105,177 106.75,175.25 112.977,175.25 119,169.227 131.926,169.227 132.024,169.325 IC20A.5@132.525,169.325 133.1,169.325 v1(133.275,169.5)
  BottomLayer w0.152: v1(133.275,169.5) 133.285,169.49 D1A.6@133.285,169.075
CC3_P: D1A.1 IC20A.6 J1.15 | length 37.1
  TopLayer w0.152: J1.15@104.19,179.279 104.947,179.279 105.156,179.07 105.156,178.837 104.695,178.376 104.695,176.874 106.624,174.945 112.851,174.945 118.874,168.923 131.926,168.923 132.024,168.825 IC20A.6@132.525,168.825 132.6,168.75 132.796,168.946 133.045,168.946 133.098,169 v1(134.25,169)
  BottomLayer w0.152: v1(134.25,169) 134.325,169 134.4,169.075 D1A.1@134.865,169.075
GND: B5.1 B7.1 B9.1 C47A.1 C47B.1 C47C.1 C47D.1 C47E.1 C47F.1 C47G.1 C47H.1 C47I.1 C47J.1 C47K.1 C47L.1 C47M.1 C47N.1 C47O.1 C47P.1 C58.1 C59.1 C62.2 C64.1 C65.1 C66.1 C67.1 C68.1 D1A.2 D1B.2 D1C.2 D1D.2 D1E.2 D1F.2 D1G.2 D1H.2 D1I.2 D1J.2 D1K.2 D1L.2 D1M.2 D1N.2 D1O.2 D1P.2 IC20A.2 IC20A.4 IC20B.2 IC20B.4 IC20C.2 IC20C.4 IC20D.2 IC20D.4 IC20E.2 IC20E.4 IC20F.2 IC20F.4 IC20G.2 IC20G.4 IC20H.2 IC20H.4 IC20I.2 IC20I.4 IC20J.2 IC20J.4 IC20K.2 IC20K.4 IC20L.2 IC20L.4 IC20M.2 IC20M.4 IC20N.2 IC20N.4 IC20O.2 IC20O.4 IC20P.2 IC20P.4 IC24.2 IC26.2 IC27.1 IC27.6 IC27.11 J1.1 J1.13 J1.14 J1.26 J1.27 J1.28 J2.1 J2.13 J2.14 J2.26 J2.27 J2.28 J14.1 J14.4 J14.7 J14.10 J14.13 J14.16 J14.19 J14.22 J14.25 J24.1 J24.4 J24.7 J24.10 J24.13 J24.16 J24.19 J24.22 J24.25 LD5.1 LD6.1 LD7.1 LD8.1 R122.1 | length 88.2
  TopLayer w0.152: LD5.1@114.425,156.5 LD7.1@114.425,158 LD8.1@114.425,159.5 LD6.1@114.425,161 114.425,162.175 v1(114.5,162.25) ; v1(114.75,185.125) C47L.1@114.75,185.875 ; v1(114.75,191.75) C47M.1@114.75,192.5 ; v1(114.75,199.625) C47O.1@114.75,200.375 ; v1(115,220.5) C47G.1@115,221.25 ; v1(115,228) C47H.1@115,228.75 ; v1(115,235.875) C47J.1@115,236.625 ; C59.1@115.5,204.25 v1(116.25,204.25) ; v1(115.75,180.625) 115.75,181.425 IC20L.2@115.825,181.5 ; v1(115.75,187.25) 115.75,188.05 IC20M.2@115.825,188.125 ; v1(115.75,195.125) 115.75,195.925 IC20O.2@115.825,196 ; v1(116,216) 116,216.8 IC20G.2@116.075,216.875 ; v1(116,223.5) 116,224.3 IC20H.2@116.075,224.375 ; v1(116,231.375) 116,232.175 IC20J.2@116.075,232.25 ; IC20L.4@116.825,181.5 117.125,181.5 117.375,181.75 v1(117.5,181.75) ; IC20M.4@116.825,188.125 117.25,188.125 v1(117.375,188.25) ; IC20O.4@116.825,196 v1(117.25,196) ; IC20G.4@117.075,216.875 117.5,216.875 v1(117.625,217) ; IC20H.4@117.075,224.375 117.5,224.375 v1(117.625,224.25) ; IC20J.4@117.075,232.25 v1(117.625,232.25) ; v1(117.5,239.25) C62.2@117.5,240.75 ; v1(117.5,242) C62.2@117.5,240.75 ; v1(119,188.5) C47P.1@119,189.25 ; v1(119,196.5) C47N.1@119,197.25 ; v1@119.3,240.75 C62.2@117.5,240.75 ; v1(119.75,231.75) C47I.1@119.75,232.5 ; v1(120,184) 120,184.8 IC20P.2@120.075,184.875 ; v1(120,192) 120,192.8 IC20N.2@120.075,192.875 ; v1(120,223.375) C47K.1@120,224.125 ; v1(120.75,227.25) 120.75,228.05 IC20I.2@120.825,228.125 ; v1(121,218.875) 121,219.675 IC20K.2@121.075,219.75 ; IC20P.4@121.075,184.875 121.5,184.875 v1(121.625,185) ; IC20N.4@121.075,192.875 121.5,192.875 v1(121.625,193) ; IC20I.4@121.825,228.125 122.25,228.125 v1(122.375,228) ; IC20K.4@122.075,219.75 v1(122.625,219.75) ; v1(122.625,179.75) 123.425,179.75 IC20F.2@123.5,179.675 ; v1(123.5,178.125) IC20F.4@123.5,178.675 ; C47B.1@123.75,171.25 v1(124.5,171.25) ; C47E.1@123.75,175.25 v1(124.5,175.25) ; v1(127.125,180.75) C47F.1@127.875,180.75 ; v1(128,177.875) 128.125,177.75 IC20E.4@128.125,177.325 ; IC20B.2@128.125,172.325 128.2,172.25 v1(129,172.25) ; IC20B.4@128.125,173.325 v1(128.925,173.325) ; IC20E.2@128.125,176.325 128.2,176.25 v1(129,176.25) ; C47A.1@131.25,167.25 v1(132,167.25) ; C47C.1@131.25,171.25 v1(132,171.25) ; C47D.1@131.25,175.25 v1(132,175.25) ; v1(134.25,158.75) 134.357,158.643 C66.1@135.407,158.643 ; v1(135.5,159.5) 135.407,159.407 C66.1@135.407,158.643 ; IC20A.2@135.625,168.325 135.7,168.25 v1(136.5,168.25) ; IC20A.4@135.625,169.325 v1(136.575,169.325) ; IC20C.2@135.625,172.325 135.7,172.25 v1(136.5,172.25) ; IC20C.4@135.625,173.325 v1(135.625,173.75) ; IC20D.2@135.625,176.325 135.7,176.25 v1(136.5,176.25) ; IC20D.4@135.625,177.325 135.625,177.75 v1(135.75,177.875) ; v1(136.652,158.75) 136.545,158.643 C66.1@135.407,158.643 ; v1(138.55,163.8) C65.1@139.25,163.8 ; v1(142.25,160.75) R122.1@143.2,160.75 ; IC27.6@142.95,159 v1(142.95,159.55) ; v1(145.05,156.45) IC27.1@145.05,157 ; v1(146.5,162) 146.55,161.95 C67.1@146.55,161.25 ; v1(147.25,156.75) C68.1@147.25,157.6 148.15,157.6 v1(148.25,157.5) ; v1(150.5,159) IC24.2@150.5,160.3 ; C58.1@150.7,156.25 v1(151.5,156.25) ; v1(154.25,159) IC26.2@154.25,160.3 ; C64.1@154.7,156.25 v1(155.5,156.25)
  BottomLayer w0.152: v1(115.75,180.625) 115.75,180.8 116,181.05 D1L.2@116,182.26 ; v1(115.75,187.25) 115.75,187.425 116,187.675 D1M.2@116,188.885 ; v1(115.75,195.125) 115.75,195.3 116,195.55 D1O.2@116,196.76 ; v1(116,216) 116,216.175 116.25,216.425 D1G.2@116.25,217.635 ; v1(116,223.5) 116,223.675 116.25,223.925 D1H.2@116.25,225.135 ; v1(116,231.375) 116,231.55 116.25,231.8 D1J.2@116.25,233.01 ; v1(120,184) 120,184.175 120.25,184.425 D1P.2@120.25,185.635 ; v1(120,192) 120,192.175 120.25,192.425 D1N.2@120.25,193.635 ; v1(120.75,227.25) 120.75,227.425 121,227.675 D1I.2@121,228.885 ; v1(121,218.875) 121,219.05 121.25,219.3 D1K.2@121.25,220.51 ; v1(122.625,179.75) 122.8,179.75 123.05,179.5 D1F.2@124.26,179.5 ; D1B.2@127.365,172.5 128.575,172.5 128.825,172.25 v1(129,172.25) ; D1E.2@127.365,176.5 128.575,176.5 128.825,176.25 v1(129,176.25) ; D1A.2@134.865,168.5 136.075,168.5 136.325,168.25 v1(136.5,168.25) ; D1C.2@134.865,172.5 136.075,172.5 136.325,172.25 v1(136.5,172.25) ; D1D.2@134.865,176.5 136.075,176.5 136.325,176.25 v1(136.5,176.25)
  other v1: 144,157.25 144,158 144,158.75 119.3,240.75
I2C1_SCL: B2.1 IC24.1 J14.27 | length 17.2
  TopLayer w0.254: J14.27@145.73,170.76 146.97,172 149.75,172 151.75,170 B2.1@151.75,162.25 151.45,161.95 IC24.1@151.45,160.3
I2C1_SDA: B1.1 IC24.3 J14.26 | length 19.3
  TopLayer w0.254: J14.26@148.27,173.3 147.97,173 146.957,173 146.177,172.221 145.664,172.221 144.651,171.207 144.651,170.099 145.451,169.299 148.717,169.299 149.349,168.667 149.349,162.401 B1.1@149.5,162.25 149.55,162.2 IC24.3@149.55,160.3
I2C2_SCL: B4.1 IC26.1 J24.27 | length 18.1
  TopLayer w0.152: IC26.1@155.2,160.3 155.2,161.7 B4.1@155.75,162.25 161.25,167.75 161.25,170.985 160.196,172.039 159.344,172.039 159.055,171.75 157.97,171.75 J24.27@157.23,171.01
I2C2_SDA: B3.1 IC26.3 J24.26 | length 19.1
  TopLayer w0.152: IC26.3@153.3,160.3 153.3,161.544 B3.1@153.75,161.994 ; B3.1@153.3,162.3 158.75,167.75 158.75,168.035 158.741,168.044 158.741,168.509 157.269,169.981 156.804,169.981 156.201,170.584 156.201,171.52 157.203,172.521 157.656,172.521 158.685,173.55 J24.26@159.77,173.55
LVDS0_N: D1P.6 IC20P.5 J14.3 | length 47.9
  TopLayer w0.152: v1(121.25,187.225) 121.075,187.4 IC20P.5@121.075,187.975 121.075,188.476 120.977,188.574 120.977,189.25 121.415,189.687 122.377,189.687 124.257,191.567 124.257,195.885 125.222,196.85 127.762,196.85 128.524,196.088 128.524,191.339 129.617,190.246 129.706,190.157 132.422,190.157 132.714,190.449 135.687,193.422 135.89,193.625 135.89,196.673 137.286,198.069 140.334,198.069 144.712,202.447 146.563,202.447 146.661,202.349 146.661,202.171 J14.3@145.73,201.24
  BottomLayer w0.152: D1P.6@120.825,187.215 121.24,187.215 v1(121.25,187.225)
LVDS0_P: D1P.1 IC20P.6 J14.2 | length 50.2
  TopLayer w0.152: v1(120.75,186.25) 120.75,187.402 120.696,187.455 120.696,187.704 120.5,187.9 IC20P.6@120.575,187.975 120.575,188.476 120.673,188.574 120.673,189.376 121.288,189.992 122.251,189.992 123.952,191.693 123.952,196.011 125.096,197.155 127.888,197.155 128.829,196.214 128.829,191.465 129.832,190.462 132.296,190.462 135.585,193.751 135.585,196.799 137.16,198.374 140.208,198.374 144.585,202.751 146.69,202.751 146.726,202.716 147.206,202.716 J14.2@148.27,203.78
  BottomLayer w0.152: v1(120.75,186.25) 120.75,186.175 120.825,186.1 D1P.1@120.825,185.635
LVDS1_N: D1O.6 IC20O.5 J14.6 | length 49.1
  TopLayer w0.152: v1(117,198.35) 116.825,198.525 IC20O.5@116.825,199.1 116.825,199.601 116.727,199.699 116.727,200 117.477,200.75 136.681,200.75 141.681,205.75 148.25,205.75 149.75,204.25 149.75,198.25 149.055,197.555 147.25,197.555 147.25,198.558 147.392,198.7 J14.6@148.27,198.7
  BottomLayer w0.152: D1O.6@116.575,198.34 116.99,198.34 v1(117,198.35)
LVDS1_P: D1O.1 IC20O.6 J14.5 | length 51.9
  TopLayer w0.152: v1(116.5,197.375) 116.5,198.527 116.446,198.58 116.446,198.829 116.25,199.025 IC20O.6@116.325,199.1 116.325,199.601 116.423,199.699 116.423,200.126 117.351,201.055 136.555,201.055 141.555,206.055 148.376,206.055 149.966,204.466 150.055,204.376 150.055,198.124 149.966,198.034 149.181,197.25 147.124,197.25 146.945,197.429 146.945,198.495 146.74,198.7 J14.5@146.304,198.7
  BottomLayer w0.152: v1(116.5,197.375) 116.5,197.3 116.575,197.225 D1O.1@116.575,196.76
LVDS2_N: D1N.6 IC20N.5 J14.9 | length 53
  TopLayer w0.152: IC20N.5@121.075,195.975 121.075,195.4 v1(121.25,195.225)
  BottomLayer w0.152: D1N.6@120.825,195.215 121.24,195.215 v1(121.25,195.225) 121.25,194.85 121.698,194.85 122.733,195.885 125.094,195.885 126.044,194.935 126.044,194.238 ; 126.038,194.348 ccw(c127.614,194.348) 129.19,194.348 cw(c131.071,194.348) 132.952,194.348 ccw(c134.528,194.348) 136.104,194.348 cw(c137.985,194.348) 139.86,194.5 140.208,194.5 140.716,195.008 140.716,199.821 141.262,200.368 141.352,200.457 142.62,200.457 143.469,199.608 143.469,198.14 144.055,197.555 149.126,197.555 149.555,197.126 149.555,195.374 148.876,194.695 146.805,194.695 J14.9@145.73,193.62
LVDS2_P: D1N.1 IC20N.6 J14.8 | length 52.8
  TopLayer w0.152: IC20N.6@120.575,195.975 120.5,195.9 120.696,195.704 120.696,195.455 120.75,195.402 v1(120.75,194.25)
  BottomLayer w0.152: D1N.1@120.825,193.635 120.825,194.1 120.75,194.175 v1(120.75,194.25) 121.529,194.25 122.859,195.58 124.968,195.58 125.739,194.809 125.739,194.195 ccw(c127.614,194.348) 129.495,194.348 cw(c131.071,194.348) 132.647,194.348 ccw(c134.528,194.348) 136.409,194.348 cw(c137.985,194.348) 139.562,194.348 ccw(c139.714,194.348) 139.714,194.195 140.334,194.195 141.021,194.882 141.021,199.695 141.478,200.152 142.494,200.152 143.165,199.481 143.165,198.014 143.929,197.25 149,197.25 149.25,197 149.25,195.5 148.75,195 147.5,195 147.5,195.5 148.16,196.16 J14.8@148.27,196.16
LVDS3_N: D1M.6 IC20M.5 J14.12 | length 46.8
  TopLayer w0.152: IC20M.5@116.825,191.225 116.825,190.65 v1(117,190.475)
  BottomLayer w0.152: D1M.6@116.575,190.465 116.99,190.465 v1(117,190.475) 117.275,190.475 117.75,190 118.736,190 cw(c120.601,189.713) 122.481,189.859 ; 122.482,189.848 ccw(c124.058,189.848) 125.634,189.848 cw(c127.515,189.848) 129.396,189.848 ccw(c130.972,189.848) 132.548,189.848 cw(c134.429,189.848) 136.31,189.848 ccw(c137.887,189.848) 139.463,189.848 ; 139.457,189.848 139.457,191.273 139.635,191.451 140.739,192.555 146.876,192.555 148.27,191.161 J14.12@148.27,191.08
LVDS3_P: D1M.1 IC20M.6 J14.11 | length 48
  TopLayer w0.152: IC20M.6@116.325,191.225 116.25,191.15 116.446,190.954 116.446,190.705 116.5,190.652 v1(116.5,189.5)
  BottomLayer w0.152: D1M.1@116.575,188.885 116.575,189.35 116.5,189.425 v1(116.5,189.5) 117.25,189.5 117.534,189.784 117.624,189.695 118.872,189.695 ccw(c118.872,189.848) 119.024,189.836 cw(c120.601,189.713) 122.177,189.841 ccw(c124.058,189.848) 125.939,189.848 cw(c127.515,189.848) 129.091,189.848 ccw(c130.972,189.848) 132.853,189.848 cw(c134.429,189.848) 136.006,189.848 ccw(c137.887,189.848) 139.761,189.695 139.761,191.146 140.865,192.25 146.75,192.25 147,192 146.3,191.3 J14.11@145.95,191.3
LVDS4_N: D1L.6 IC20L.5 J14.15 | length 45
  TopLayer w0.152: v1(117,183.85) 116.825,184.025 IC20L.5@116.825,184.6 116.825,185.202 116.923,185.3 117.375,185.3 118.5,184.175 118.5,183.819 119.284,183.034 119.374,182.945 121.251,182.945 121.341,183.034 124.46,186.154 127.988,186.154 128.524,186.69 128.683,186.849 128.683,187.402 ; 128.676,187.402 cw(c130.253,187.402) 131.829,187.402 ccw(c133.71,187.402) 135.591,187.402 cw(c137.167,187.402) 138.743,187.402 ccw(c140.624,187.402) 142.499,187.25 145.134,187.25 145.178,187.207 146.762,187.207 146.958,187.01 146.958,186.792 146.522,186.792 J14.15@145.73,186
  BottomLayer w0.152: D1L.6@116.575,183.84 116.99,183.84 v1(117,183.85)
LVDS4_P: D1L.1 IC20L.6 J14.14 | length 46.9
  TopLayer w0.152: v1(116.5,182.875) 116.5,184.027 116.446,184.08 116.446,184.329 116.25,184.525 IC20L.6@116.325,184.6 116.325,185.101 116.423,185.199 116.423,185.426 116.601,185.605 117.501,185.605 118.805,184.301 118.805,183.945 119.5,183.25 121.125,183.25 124.244,186.369 124.334,186.459 127.862,186.459 128.378,186.975 128.378,187.555 cw(c130.253,187.402) 132.134,187.402 ccw(c133.71,187.402) 135.286,187.402 cw(c137.167,187.402) 139.048,187.402 ccw(c140.624,187.402) 142.2,187.402 cw(c142.353,187.402) 142.353,187.555 145.261,187.555 145.304,187.511 147.241,187.511 J14.14@148.27,188.54
  BottomLayer w0.152: v1(116.5,182.875) 116.5,182.8 116.575,182.725 D1L.1@116.575,182.26
LVDS5_N: D1D.3 IC20D.1 J14.18 R131D.1 | length 24.7
  TopLayer w0.152: R131D.1@134.65,174.775 134.65,175.55 v1(134.675,175.575) 134.925,175.825 IC20D.1@135.625,175.825
  BottomLayer w0.152: D1D.3@134.865,176.075 D1D.3@134.865,176 134.865,175.765 v1(134.675,175.575) 134.54,175.575 134.24,175.275 134.927,174.587 135.017,174.677 137.75,174.677 142,178.927 142,183.181 143.624,184.805 146.626,184.805 147.296,184.135 147.296,184.008 147.845,183.46 J14.18@148.27,183.46
LVDS5_P: D1D.4 IC20D.8 J14.17 R131D.2 | length 24.8
  TopLayer w0.152: IC20D.8@132.525,175.825 133.25,175.825 v1(133.5,175.575) 133.71,175.365 R131D.2@133.71,174.775
  BottomLayer w0: 146.75,184.25 146.902,184.098
  BottomLayer w0.152: D1D.4@133.285,176.075 D1D.4@133.285,176 133.285,175.79 v1(133.5,175.575) 133.635,175.575 133.935,175.275 133.935,175.149 134.712,174.372 134.801,174.283 135.054,174.283 135.143,174.372 137.876,174.372 142.305,178.8 142.305,183.055 143.75,184.5 146.5,184.5 146.75,184.25 145.96,183.46 J14.17@145.73,183.46
LVDS6_N: D1C.3 IC20C.1 J14.21 R131C.1 | length 22
  TopLayer w0.152: IC20C.1@135.625,171.825 134.925,171.825 v1(134.675,171.575) 134.65,171.55 R131C.1@134.65,170.775 134.332,170.457 134.332,170.275 134.357,170.25 135.75,170.25 142.75,177.25 146.25,177.25 146.75,177.75 146.75,179.5 146.5,179.5 145.73,178.73 J14.21@145.73,178.38
  BottomLayer w0.152: v1(134.675,171.575) 134.865,171.765 D1C.3@134.865,172
LVDS6_P: D1C.4 IC20C.8 J14.20 R131C.2 | length 23.4
  TopLayer w0.152: IC20C.8@132.525,171.825 133.25,171.825 v1(133.5,171.575) 133.71,171.365 R131C.2@133.71,170.775 134.028,170.457 134.028,170.149 134.231,169.945 135.876,169.945 142.876,176.945 146.376,176.945 146.966,177.534 147.055,177.624 147.055,179.705 J14.20@148.27,180.92
  BottomLayer w0.152: D1C.4@133.285,172.075 D1C.4@133.285,172 133.285,171.79 v1(133.5,171.575)
LVDS7_N: D1B.3 IC20B.1 J14.24 R131B.1 | length 28.9
  TopLayer w0.152: R131B.1@127.15,170.775 127.15,171.55 v1(127.175,171.575) 127.425,171.825 IC20B.1@128.125,171.825
  BottomLayer w0.152: D1B.3@127.365,172.075 D1B.3@127.365,172 127.365,171.765 v1(127.175,171.575) 126.74,171.14 126.74,170.775 127.265,170.25 132.917,170.25 132.951,170.283 133.599,170.283 133.633,170.25 137,170.25 144.138,177.388 145.267,177.388 145.304,177.351 146.156,177.351 146.193,177.388 146.641,177.388 146.73,177.299 147.152,176.876 147.152,176.75 148.062,175.84 J14.24@148.27,175.84
LVDS7_P: D1B.4 IC20B.8 J14.23 R131B.2 | length 29
  TopLayer w0.152: IC20B.8@125.025,171.825 125.75,171.825 v1(126,171.575) 126.21,171.365 R131B.2@126.21,170.775
  BottomLayer w0.152: D1B.4@125.785,172.075 D1B.4@125.785,172 125.785,171.79 v1(126,171.575) 126.435,171.14 126.435,170.649 127.138,169.945 133.043,169.945 133.077,169.979 133.473,169.979 133.507,169.945 137.126,169.945 144.264,177.083 145.141,177.083 145.178,177.047 146.282,177.047 146.319,177.083 146.514,177.083 146.848,176.75 145.938,175.84 J14.23@145.73,175.84
LVDS8_N: D1K.6 IC20K.5 J24.3 | length 74.3
  TopLayer w0.152: IC20K.5@122.075,222.85 122.075,222.275 v1(122.25,222.1)
  BottomLayer w0.152: D1K.6@121.825,222.09 122.24,222.09 v1(122.25,222.1) 122.25,221.575 122.575,221.25 128.38,221.25 cw(c129.753,221.098) 131.134,221.098 ccw(c132.21,221.098) 133.286,221.098 cw(c134.667,221.098) 136.048,221.098 ccw(c137.124,221.098) 138.2,221.098 cw(c139.581,221.098) 140.962,221.098 ccw(c142.039,221.098) 143.115,221.098 cw(c144.496,221.098) 145.877,221.098 ccw(c146.953,221.098) 148.029,221.098 cw(c148.182,221.098) 148.182,221.25 150.681,221.25 151.282,220.649 cw(c152.145,219.571) 153.526,219.571 cw(c152.145,219.571) 153.122,218.594 ccw(c153.882,217.833) 154.643,217.072 cw(c155.62,216.096) 157.001,216.096 cw(c155.62,216.096) 156.698,215.233 162.305,209.626 162.305,203.124 161.7,202.519 158.937,202.519 158.259,202.519 J24.3@157.23,201.49
LVDS8_P: D1K.1 IC20K.6 J24.2 | length 74.1
  TopLayer w0.152: IC20K.6@121.575,222.85 121.5,222.775 121.696,222.579 121.696,222.33 121.75,222.277 v1(121.75,221.125)
  BottomLayer w0.152: D1K.1@121.825,220.51 121.825,220.975 121.75,221.05 v1(121.75,221.125) 121.93,220.945 122.575,220.945 128.524,220.945 ccw(c128.524,221.098) 128.676,221.098 cw(c129.753,221.098) 130.829,221.098 ccw(c132.21,221.098) 133.591,221.098 cw(c134.667,221.098) 135.743,221.098 ccw(c137.124,221.098) 138.505,221.098 cw(c139.581,221.098) 140.658,221.098 ccw(c142.039,221.098) 143.42,221.098 cw(c144.496,221.098) 145.572,221.098 ccw(c146.953,221.098) 148.326,220.945 150.555,220.945 151.168,220.332 ; 151.168,220.332 ccw(c151.276,220.439) 151.384,220.332 cw(c152.145,219.571) 153.221,219.571 cw(c152.145,219.571) 152.906,218.81 ccw(c153.882,217.833) 154.859,216.857 cw(c155.62,216.096) 156.696,216.096 cw(c155.62,216.096) 156.381,215.335 ccw(c156.489,215.227) 156.381,215.119 162,209.5 162,203.25 161.573,202.823 158.937,202.823 158.75,203.01 J24.2@159.77,204.03
LVDS9_N: D1J.6 IC20J.5 J24.6 | length 73.8
  TopLayer w0.152: v1(117.25,234.6) 117.075,234.775 IC20J.5@117.075,235.35 117.075,235.851 116.977,235.949 116.977,236.25 117.727,237 122.25,237 131.12,228.13 ; 131.119,228.131 ccw(c131.227,228.238) 131.335,228.13 cw(c132.096,227.369) 133.172,227.369 cw(c132.096,227.369) 132.857,226.608 ccw(c133.834,225.632) 134.696,224.554 142.25,217 150.75,217 153.339,214.411 154.178,213.572 154.178,198.891 155.624,197.445 158.195,197.445 158.75,198 158.75,198.319 159.381,198.95 J24.6@159.77,198.95
  BottomLayer w0.152: D1J.6@116.825,234.59 117.24,234.59 v1(117.25,234.6)
LVDS9_P: D1J.1 IC20J.6 J24.5 | length 75.2
  TopLayer w0.152: v1(116.75,233.625) 116.75,234.777 116.696,234.83 116.696,235.079 116.5,235.275 IC20J.6@116.575,235.35 116.575,235.851 116.673,235.949 116.673,236.376 117.601,237.305 122.376,237.305 131.233,228.448 cw(c132.096,227.369) 133.477,227.369 cw(c132.096,227.369) 133.073,226.393 ccw(c133.834,225.632) 134.595,224.871 cw(c134.702,224.763) 134.811,224.871 ; 134.81,224.871 142.376,217.305 150.876,217.305 153.555,214.626 154.483,213.698 154.483,199.017 155.75,197.75 158,197.75 158.445,198.195 158.445,198.32 158.265,198.5 157.68,198.5 J24.5@157.23,198.95
  BottomLayer w0.152: v1(116.75,233.625) 116.75,233.55 116.825,233.475 D1J.1@116.825,233.01